# Altium PCB PCB1.PcbDoc (part 2 of 2)
Units mil, origin at the board's own origin, x right, y up, seen from the top; angles counter-clockwise.
Board outline 5117.33 x 2903.43 mil, 4 copper layers (Top Layer, Layer 1, Layer 2, Bottom Layer), stack 62.13 mil thick; 147 components, 97 nets, 532 pads, 86 vias.
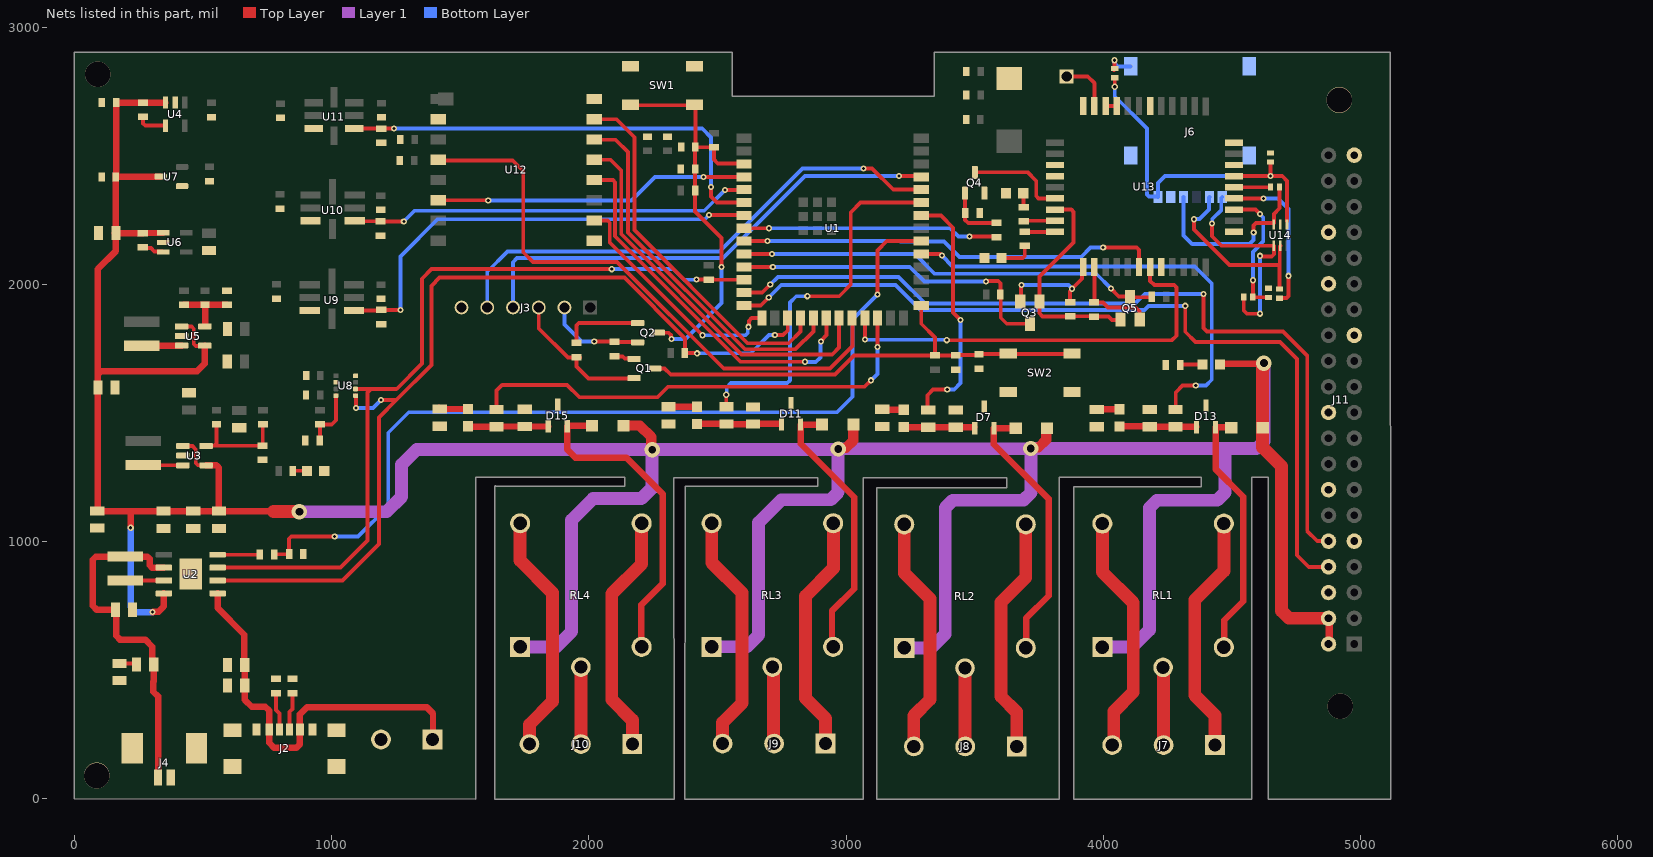
[diagram p4: the nets of this part, all layers, seen from the top]

## Via types
v1: diameter 24, hole 12, Top Layer to Bottom Layer, 75 vias
v2: diameter 60, hole 30, Top Layer to Bottom Layer, 7 vias
v3: diameter 100, hole 98.43, Top Layer to Bottom Layer, 4 vias

## Nets (pads, with @x,y where several pads share a name; then routed paths per layer and width w, separated by ;. In a path a pad name is that pad's centre, name@x,y a point inside that pad or via, vN(x,y) a via of type N, cw(c..) or ccw(c..) an arc to the next point about the centre after c; other vN are vias at no path point) (continued)
5V: C9.2 C10.2 C11.2 C12.2 C18.2 C20.2 C25.2 C27.2 D5.1 D6.1 D8.1 D10.1 D14.1 J11.2 J11.4 R16.2 R17.1 RL1.A1 RL2.A1 RL3.A1 RL4.A1 U2.8 U3.1 U3.4 U4.3 U5.1 U5.4 U6.1 U7.3 | length 15388.4
  Top Layer w15: C12.2@89,1118.46 C12.2@91.54,1121 ; C25.2@161.46,2199 161.56,2199.1 C25.2@162.02,2199.56 ; 218,1118.46 219,1117.47 ; R17.1@266,2198.56 R17.1@266.92,2199.48 ; U7.3@334.77,2418.5 U7.3@335.27,2419 ; U6.1@344.08,2199.48 U6.1@345,2200.4 ; U4.3@354.16,2706.56 U4.3@354.6,2707 ; U5.1@416.92,1836.4 417.32,1836 455.21,1836 464,1827.21 464,1768.79 472.79,1760 U5.4@505.48,1760 ; U3.1@421.92,1371.4 422.32,1371 459,1371 472,1358 472,1305.79 480.79,1297 511.68,1297 U3.4@512.08,1296.6
  Top Layer w25: C12.2@89,1118.46 218,1118.46 C11.2@561,1118.46 ; C12.2@91.54,1121 91.54,1649.54 ; C25.2@157.02,2198.56 C25.2@161.56,2198.56 ; C27.2@161.56,2417 161.56,2199.1 C25.2@161.56,2198.56 ; C27.2@161.66,2418 161.66,2429.54 162.56,2430.44 C18.2@162.56,2706 259.35,2706 259.81,2706.46 R16.2@266.44,2706.46 ; C27.2@166.06,2418.5 U7.3@334.77,2418.5 ; v1(219,1054) 219,1117.47 ; R17.1@266,2198.56 C25.2@161.56,2198.56 ; R17.1@266.92,2199.48 U6.1@344.08,2199.48 ; R16.2@267,2706.56 U4.3@354.16,2706.56 ; v1(304,726) 306.1,728.1 327.93,728.1 347.94,748.11 U2.8@347.94,799 ; U5.4@507.08,1761.6 507.08,1692.08 478,1663 105,1663 91.54,1649.54 ; U3.4@512.08,1296.6 552.21,1296.6 561,1287.81 C11.2@561,1119.47 ; C11.2@562,1118.46 773.46,1118.46 ; D8.1@4452.47,1689 4454.96,1691.5 4621.5,1691.5 4622.09,1692.09 v2(4624,1694) ; 91.54,1649.54 91.54,2059.54 161.56,2129.56 C25.2@161.56,2198.56
  Top Layer w30: J11.2@4878,602 J11.4@4878,702
  Top Layer w40: D14.1@2134.02,1451 2198,1451 2242.17,1406.83 2242.17,1360.83 v2(2246,1357) ; v2(2969,1360) 2972.83,1363.83 2999.18,1363.83 3028.02,1392.67 D10.1@3028.02,1455 ; v2(3718,1362) 3721.83,1365.83 3747.8,1365.83 3777.4,1395.43 3777.4,1437.36 3780.04,1440 D6.1@3781.02,1440
  Top Layer w50: 774.7,1117.23 v2@873.77,1117.23 ; v2@4622.09,1692.09 4622.09,1677.38 4619.02,1674.32 D5.1@4619.02,1442 4619.02,1365.98 4692,1293 4692,731 4721,702 J11.4@4875,702
  Layer 1 w50: v2(875,1116) 1213.59,1116 1272.17,1174.58 1272.17,1299.42 1330.75,1358 2245,1358 v2(2246,1357) ; RL4.A1@1732.78,590.95 1872.95,590.95 1933,651 1933,1084 2016,1167 2203.4,1167 2246,1209.6 v2(2246,1357) ; RL3.A1@2477,591.11 2614.11,591.11 2660,637 2660,1074.71 2748.29,1163 2939.71,1163 2969,1192.29 v2(2969,1360) 2967.5,1358.5 2247.5,1358.5 v2(2246,1357) ; v2@2973.62,1361 3717,1361 v2(3718,1362) 3718,1190.29 3688.71,1161 3414.29,1161 3385,1131.71 3385,641 3330.95,586.95 RL2.A1@3225.78,586.95 ; v2@3720.71,1362 4472,1362 ; RL1.A1@3995.78,589.95 4111.95,589.95 4179,657 4179,1131.71 4208.29,1161 4442.71,1161 4472,1190.29 4472,1362 ; v2(4624,1694) 4625,1693 4625,1391.29 4595.71,1362 4472,1362
  Bottom Layer w25: v1(219,1054) 219,747 240,726 v1(304,726)
ENABLE: C2.2 C5.1 Q2.3 R3.2 R6.1 SW1.1 U1.3 | length 1624.3
  Top Layer w15: SW1.1@2168.06,2696 2414,2696 C2.2@2414,2533 ; Q2.3@2270.35,1812 2310.14,1812 2319.28,1802.87 2319.28,1788.7 v1(2321,1786.98) ; R3.2@2486,2532.44 2486,2485 2501,2470 2601.02,2470 U1.3@2603.02,2468 ; R3.2@2487,2532.44 2486.72,2532.72 2413.84,2532.72 C2.2@2413.56,2533 2413.06,2532.5 2413.06,2448.5 C5.1@2412.56,2448 R6.1@2412.56,2365 2412.56,2282.63 2515,2180.19 v1(2515,2068)
  Bottom Layer w15: v1(2321,1786.98) 2374.98,1786.98 2515,1927 v1(2515,2068)
G.RXD: Q5.2 R31.1 U13.2 | length 353.4
  Top Layer w15: R31.1@3964,1929.56 3964.56,1929 3999,1929 4018.39,1909.61 4125.61,1909.61 4141,1894.21 4141,1864.09 Q5.2@4141.4,1863.69 ; R31.1@3965.07,1935.66 U13.2@3965.07,2066.7
G.TXD: Q3.2 R29.1 U13.1 | length 428.2
  Top Layer w15: Q3.2@3676.6,1933.31 3679,1935.71 3679,1991.56 3682,1994.56 v1(3682,1997) ; R29.1@3870.35,1928.35 3870.35,1972.63 3878.28,1980.56 v1(3878.28,1983) 3917.22,2021.93 3917.22,2062.16 U13.1@3921.76,2066.7 ; R29.1@3880.65,1931.35 R29.1@3881,1931
  Bottom Layer w15: v1(3682,1997) 3836.28,1997 3864.26,1997 v1(3878.28,1983)
GND: C1.2 C2.1 C3.2 C4.1 C5.2 C6.2 C7.1 C8.1 C9.1 C10.1 C11.1 C12.1 C14.1 C15.1 C16.1 C17.1 C18.1 C19.1 C20.1 C22.1 C23.1 C24.1 C25.1 C26.1 C27.1 C28.1 C29.1 C30.1 C31.1 C32.1 C33.1 C34.1 C35.1 C36.1 C37.1 C38.2 C39.1 C40.1 C41.1 C42.2 C43.1 D1.2 D2.2 D3.2 D7.3 D11.3 D13.3 D15.3 J1.2 J2.A12 J2.B12 J2.S1 J2.S2 J2.S3 J2.S4 J3.06 J4.1 J4.3 J4.4 J6.C5 J6.SH1 J6.SH2 J6.SH3 J11.6 J11.9 J11.14 J11.20 J11.25 J11.30 J11.34 J11.39 Q4.2 R1.2 R2.2 R14.1 R15.1 R19.1 R21.2 R22.2 R23.2 R24.1 R30.1 R38.2 R40.2 R41.2 R42.2 R44.2 R45.2 R46.2 R48.2 R49.2 SW1.2 SW2.2 U2.9 U3.2 U4.2 U5.2 U6.2 U7.1 U8.1 U8.7 U9.3 U10.3 U11.3 U12.2 U12.9 U12.16 U13.8 U13.13 U13.19 U13.21 U13.27 U13.30 U13.31 U13.33 U13.36 U13.37 U14.2 | length 43.3
  Top Layer w15: U13.31@4008.38,2692.69 U13.30@4051.69,2692.69
  other v3: 86.61,90.55 4920.28,360.24 4916.34,2716.54 90.55,2816.93
IO0: C4.2 C6.1 Q1.3 R7.1 SW2.1 U1.27 | length 1886.5
  Top Layer w15: Q1.3@2256.35,1673 2294,1673 2318,1649 2956,1649 3030.24,1723.24 R7.1@3345.68,1723.24 ; U1.27@3292,1918 3292,1847 3345.68,1793.32 R7.1@3345.68,1723.24 ; R7.1@3346,1723.56 R7.1@3345.68,1723.24 ; R7.1@3346.28,1723.84 3425.72,1723.84 3427.72,1725.84 3515.28,1725.84 3519.12,1729.68 3628.48,1729.68 3629.98,1728.18 3630.61,1728.8 SW2.1@3882,1728.8
NetC13_1: C13.1 R11.1 R14.2 U3.5 | length 387.2
  Top Layer w15: U3.5@512.08,1371.4 513.38,1372.7 543,1372.7 ; C13.1@552,1456.44 552,1381.7 543,1372.7 ; R14.2@731,1372.7 543,1372.7 ; R14.2@732,1372.56 732.5,1373.06 732.5,1451.94 R11.1@733,1452.44
NetC16_2: C16.2 J4.2 L2.2 R13.2 U2.6 | length 1359.9
  Top Layer w15: C16.2@158.54,736 C16.2@159.54,735
  Top Layer w25: C16.2@158.54,736 86,736 71,751 71,929 83.65,941.65 284.21,941.65 293,932.87 293,907.79 301.79,899 U2.6@347.94,899 ; C16.2@159.54,735 162.49,732.05 162.49,634.01 177.13,619.37 275.17,619.37 303.25,591.29 303.25,538.06 304.11,537.2 R13.2@312.8,537.2 ; R13.2@308.46,523 308.46,456.46 307,455 307,417 325.39,398.61 J4.2@325.39,82.83
NetC17_2: C17.2 R13.1 | length 68
  Top Layer w15: C17.2@175,526.46 238.07,526.46 R13.1@241.54,523
NetC21_1: C21.1 R18.1 R19.2 U5.5 | length 245.9
  Top Layer w15: U5.5@507.08,1836.4 U5.5@508.24,1837.56
  Top Layer w25: R18.1@426,1920.44 R19.2@592,1920.44 ; U5.5@508.1,1839.79 C21.1@508.1,1918.04
NetC43_2: C43.2 R35.1 U13.15 | length 514
  Top Layer w15: U13.15@4508,2290.61 4591.39,2290.61 v1(4609,2273) ; v1(4581,2016) 4580.72,2015.72 R35.1@4580.72,1951 4581.57,1950.14 4641.15,1950.14 C43.2@4642,1949.28
  Bottom Layer w15: v1(4581,2016) 4581,2126 4621,2166 4621,2261 v1(4609,2273)
NetD1_1: D1.1 R8.1 | length 54.5
  Top Layer w15: R8.1@849.56,1275.5 D1.1@904.03,1275.5
NetD2_1: D2.1 R26.2 | length 66.1
  Top Layer w15: D2.1@3688.47,2354 D2.1@3688.47,2366.63 ; R26.2@3690,2300.56 D2.1@3690,2354
NetD3_1: D3.1 R25.2 | length 131.8
  Top Layer w15: D3.1@3604.47,2102 3685.21,2102 3694,2110.79 R25.2@3694,2149.44
NetD4_1: D4.1 D13.1 R37.2 R46.1 | length 304.3
  Top Layer w15: D4.1@4060,1450.53 D4.1@4062,1448.54 ; R46.1@4178,1448.54 R46.1@4180,1446.54 ; D13.1@4360.46,1446.54 D13.1@4362,1445
  Top Layer w25: D4.1@4062,1448.54 R46.1@4178,1448.54 ; R46.1@4180,1446.54 D13.1@4360.46,1446.54
NetD4_2: D4.2 R38.1 | length 88.4
  Top Layer w15: R38.1@3974,1513.46 R38.1@3974.5,1513.96 ; D4.2@4061.5,1513.96 D4.2@4062,1514.47
  Top Layer w25: R38.1@3974.5,1513.96 D4.2@4061.5,1513.96
NetD5_2: D5.2 D13.2 RL1.A2 | length 993.4
  Top Layer w15: D5.2@4493.98,1445 D5.2@4496.98,1442
  Top Layer w25: RL1.A2@4468.22,589.95 4470,591.73 4470,694 4544,768 4544,1174 4436,1282 D13.2@4436,1445 D5.2@4493.98,1445
NetD6_2: D6.2 D7.2 RL2.A2 | length 1061.5
  Top Layer w15: RL2.A2@3698.22,586.95 RL2.A2@3700,588.73
  Top Layer w25: D7.2@3574,1441 3574,1379 3787,1166 3787,790 3700,703 RL2.A2@3700,588.73 ; D7.2@3576.5,1440 D6.2@3658.98,1440
NetD7_1: D7.1 D9.1 R39.2 R40.1 | length 278.5
  Top Layer w15: D9.1@3224,1445.53 D9.1@3224.5,1445.04 ; R39.2@3318.5,1445.04 R39.2@3319,1444.54 ; D7.1@3497.5,1444.54 3500,1442.04 D7.1@3500,1441
  Top Layer w25: D9.1@3224.5,1445.04 R39.2@3318.5,1445.04 ; R39.2@3319,1444.54 D7.1@3497.5,1444.54
NetD8_2: D8.2 R42.1 | length 88.4
  Top Layer w15: R42.1@4298,1687 4299,1688 4384.53,1688 D8.2@4385.53,1689
NetD9_2: D9.2 R41.1 | length 84.8
  Top Layer w15: R41.1@3140,1514.46 R41.1@3142,1512.47
  Top Layer w25: R41.1@3142,1512.47 D9.2@3224,1512.47
NetD10_2: D10.2 D11.2 RL3.A2 | length 1070.5
  Top Layer w25: D10.2@2905.98,1455 D11.2@2823,1455 2823,1380 3031,1172 3031,817 2945,731 2945,595.55 RL3.A2@2949.44,591.11
NetD11_1: D11.1 D12.1 R43.2 R44.1 | length 331.6
  Top Layer w15: R43.2@2535,1457.54 R43.2@2535.5,1457.04 ; R44.1@2637.5,1457.04 R44.1@2638,1456.54 R44.1@2639.5,1458.04 ; D11.1@2746.5,1458.04 2749,1455.54 D11.1@2749,1455
  Top Layer w25: D12.1@2420,1457.53 R43.2@2535,1457.54 ; R43.2@2535.5,1457.04 R44.1@2637.5,1457.04 ; R44.1@2639.5,1458.04 D11.1@2746.5,1458.04
NetD12_2: D12.2 R45.1 | length 110
  Top Layer w25: R45.1@2310,1524.46 D12.2@2420,1524.47
NetD14_2: D14.2 D15.2 RL4.A2 | length 1259.1
  Top Layer w15: RL4.A2@2204,592.17 RL4.A2@2205.22,590.95
  Top Layer w25: D14.2@2011.98,1451 1918.5,1451 1916,1448.5 D15.2@1916,1448 1916,1358 1947.16,1326.84 2145.16,1326.84 2287,1185 2287,837 2204,754 RL4.A2@2204,592.17
NetD15_1: D15.1 D16.1 R47.2 R48.1 | length 311.4
  Top Layer w15: D16.1@1530,1448.53 1545,1448.53 D16.1@1547,1446.54
  Top Layer w25: D16.1@1547,1446.54 R47.2@1641,1446.54 ; R47.2@1642,1447.54 R48.1@1751,1447.54 D15.1@1841.54,1447.54
NetD16_2: D16.2 R49.1 | length 116.1
  Top Layer w15: R49.1@1418,1525.46 R49.1@1428,1515.47
  Top Layer w25: R49.1@1428,1515.47 D16.2@1530,1515.47
NetJ2_A5: J2.A5 R1.1 | length 145.8
  Top Layer w15: 784,345 797.32,331.68 J2.A5@797.32,269.11 ; 784,347 R1.1@784,411.44
NetJ2_B5: J2.B5 R2.1 | length 143
  Top Layer w15: J2.B5@836.68,269.11 836.69,338.69 848,350 ; 848,352 R2.1@848,409.44
NetJ3_02: J3.02 Q2.2 R9.1 | length 363.2
  Top Layer w15: v1(2021,1778) 2021.72,1777.28 2099.28,1777.28 R9.1@2100,1776.56 Q2.2@2174.56,1776.56
  Bottom Layer w15: J3.02@1905,1910 1905,1844.42 1971.42,1778 v1(2021,1778)
NetJ3_03: J3.03 Q1.2 R10.1 | length 576.5
  Top Layer w15: J3.03@1805,1910 1805,1829 1918.56,1715.44 R10.1@1952,1715.44 ; R10.1@1952,1717.44 R10.1@1952,1715.44 ; R10.1@1965,1715.44 R10.1@1952,1715.44 ; Q1.2@2183.97,1634 1998,1634 1952,1680 R10.1@1952,1715.44
NetJ3_04: J3.04 U1.37 | length 1903
  Top Layer w15: v1(3205.12,2421) 3289,2421 U1.37@3292,2418
  Bottom Layer w15: J3.04@1705,1910 1705,2086 1721,2102 2521,2102 2840,2421 v1(3205.12,2421)
NetJ3_05: J3.05 U1.36 | length 2026.9
  Top Layer w15: v1(3068,2450) 3101,2450 3183,2368 U1.36@3292,2368
  Bottom Layer w15: J3.05@1605,1910 1605,2049 1684,2128 2507,2128 2830,2451 3067,2451 v1(3068,2450)
NetJ5_01: J5.01 U13.32 | length 208.1
  Top Layer w15: J5.01@3857,2808 3939,2808 3965.07,2781.93 U13.32@3965.07,2692.69
NetJ6_S/W: J6.S/W R36.2 | length 119.4
  Top Layer w15: R36.2@4040,2832.72 4040.46,2832.72 4043,2835.26 v1(4043,2871)
  Bottom Layer w15: v1(4043,2871) 4043,2860 4055.54,2847.46 J6.S/W@4106.37,2847.46
NetJ7_1: J7.1 RL1.NO | length 940.8
  Top Layer w15: J7.1@4433,210.11 J7.1@4434,209.11
  Top Layer w50: J7.1@4433,210.11 4433,325.11 4355,403.11 4355,773.11 4468.22,886.33 RL1.NO@4468.22,1070.27
NetJ7_2: J7.2 RL1.COM | length 302.9
  Top Layer w15: RL1.COM@4232,511.21 RL1.COM@4233,510.21 ; J7.2@4233,210.11 J7.2@4234,209.11
  Top Layer w50: J7.2@4233,210.11 RL1.COM@4233,510.21
NetJ7_3: J7.3 RL1.NC | length 944.9
  Top Layer w15: J7.3@4034,209.11 J7.3@4040,215.11
  Top Layer w50: RL1.NC@3995.78,1070.27 3995.78,882.33 4116,762.11 4116,415.11 4040,339.11 J7.3@4040,215.11
NetJ8_1: J8.1 RL2.NO | length 928.3
  Top Layer w50: J8.1@3663,204.11 3663,337.11 3602,398.11 3602,764.11 3698.22,860.33 RL2.NO@3698.22,1067.27
NetJ8_2: J8.2 RL2.COM | length 304.5
  Top Layer w15: RL2.COM@3462,508.21 RL2.COM@3462.5,507.71 ; J8.2@3462.5,204.61 J8.2@3463,204.11
  Top Layer w50: J8.2@3462.5,204.61 RL2.COM@3462.5,507.71
NetJ8_3: J8.3 RL2.NC | length 930.8
  Top Layer w50: RL2.NC@3225.78,1067.27 3225.78,878.33 3326,778.11 3326,386.11 3263,323.11 J8.3@3263,204.11
NetJ9_1: J9.1 RL3.NO | length 936.3
  Top Layer w50: J9.1@2920,215.11 2920,313.11 2842,391.11 2842,788.11 2950.22,896.33 RL3.NO@2950.22,1074.27
NetJ9_2: J9.2 RL3.COM | length 302.6
  Top Layer w15: RL3.COM@2714,515.21 RL3.COM@2717,512.21 ; J9.2@2717,218.11 J9.2@2720,215.11
  Top Layer w50: J9.2@2717,218.11 RL3.COM@2717,512.21
NetJ9_3: J9.3 RL3.NC | length 938.8
  Top Layer w50: RL3.NC@2477.78,1074.27 2477.78,918.33 2595,801.11 2595,372.11 2520,297.11 J9.3@2520,215.11
NetJ10_1: J10.1 RL4.NO | length 939.4
  Top Layer w50: J10.1@2169,213.11 2169,306.11 2089,386.11 2089,797.11 2205.22,913.33 RL4.NO@2205.22,1071.27
NetJ10_2: J10.2 RL4.COM | length 299.1
  Top Layer w50: J10.2@1969,213.11 RL4.COM@1969,512.21
NetJ10_3: J10.3 RL4.NC | length 946.9
  Top Layer w50: RL4.NC@1732.78,1071.27 1732.78,926.33 1858,801.11 1858,378.11 1769,289.11 J10.3@1769,213.11
NetJ11_8: J11.8 U1.14 | length 3278.4
  Top Layer w15: U1.14@2603.02,1918 2668,1918 v1(2699,1949) ; v1(4318,1916.5) 4318,1816 4358,1776 4687,1776 4753,1710 4753,947 4798,902 J11.8@4875,902
  Bottom Layer w15: v1(2699,1949) 2747.75,1997.75 3191.25,1997.75 3289,1900 4159,1900 4175.5,1916.5 v1(4318,1916.5)
NetJ11_10: J11.10 U1.13 | length 3229.6
  Top Layer w15: U1.13@2603.02,1968 2674,1968 v1(2705,1999) ; v1(4389,1962) 4389,1831 4403,1817 4698,1817 4792,1723 4792,1042 4831.38,1002.62 4874.38,1002.62 J11.10@4875,1002
  Bottom Layer w15: v1(2705,1999) 2735,2029 3203.33,2029 3307.33,1925 4123,1925 4160.74,1962.74 4388.26,1962.74 v1(4389,1962)
NetL1_1: L1.1 U3.3 | length 155.2
  Top Layer w15: L1.1@267,1297.35 267.37,1296.97 421.55,1296.97 U3.3@421.92,1296.6
NetL2_1: L2.1 U2.7 | length 149.3
  Top Layer w15: L2.1@198.65,849 U2.7@347.94,849
NetL3_1: L3.1 U5.3 | length 155
  Top Layer w15: L3.1@262,1761.35 L3.1@262.13,1761.47 ; U5.3@416.8,1761.47 U5.3@416.92,1761.6
  Top Layer w25: L3.1@262.13,1761.47 U5.3@416.8,1761.47
NetQ1_1: Q1.1 R9.2 | length 80.2
  Top Layer w15: R9.2@2100,1721.44 2102.27,1719.17 2131.83,1719.17 2139.46,1711.54 2174.51,1711.54 Q1.1@2175.65,1710.4
NetQ2_1: Q2.1 R10.2 | length 309.3
  Top Layer w15: R10.2@1952,1772.56 1952,1840.62 1960.79,1849.4 Q2.1@2189.65,1849.4
NetQ4_1: Q4.1 R27.2 R30.2 | length 231.5
  Top Layer w15: Q4.1@3462.6,2354.65 3462.6,2250.49 3474.53,2238.56 R27.2@3585,2238.56
NetR12_1: R12.1 R15.2 U1.32 | length 3498.7
  Top Layer w15: R12.1@776.56,950 777.56,951 833.44,951 R15.2@834.44,952 834.44,1011.21 843.23,1020 v1(1012,1020) ; v1(3122,1961) 3122,2132 3158,2168 U1.32@3292,2168
  Bottom Layer w15: v1(1012,1020) 1103,1020 1220,1137 1220,1423 1300,1503 2965,1503 3025,1563 3025,1864 v1(3122,1961)
NetR12_2: R12.2 U2.4 | length 167.2
  Top Layer w15: U2.4@557,949 557.28,948.72 723.72,948.72 R12.2@724,948.44
NetR16_1: R16.1 U4.4 | length 116.9
  Top Layer w15: R16.1@267,2651.44 267,2625.79 275.79,2617 U4.4@354.6,2617
NetR17_2: R17.2 U6.3 | length 86.4
  Top Layer w15: R17.2@266,2143.44 268.77,2140.67 297.33,2140.67 310.79,2127.21 343.39,2127.21 U6.3@345,2125.6
NetR20_1: R20.1 R24.2 U8.5 | length 225.4
  Top Layer w15: R24.2@953.56,1393 954.28,1393.72 954.28,1452.72 R20.1@955,1453.44 ; R20.1@955,1455.44 1000.44,1455.44 1016.81,1471.81 U8.5@1016.81,1567.61
NetR21_1: R21.1 U1.5 U10.5 | length 1563
  Top Layer w15: U10.5@1090.06,2247.34 1091.95,2245.45 R21.1@1188.11,2245.45 ; R21.1@1190,2244.56 v1(1280.56,2244.56) ; v1(2529,2366.62) 2529.69,2367.31 2602.33,2367.31 U1.5@2603.02,2368
  Bottom Layer w15: v1(1280.56,2244.56) 1322,2286 2448.38,2286 v1(2529,2366.62)
NetR22_1: R22.1 U1.6 U11.5 | length 1769.3
  Top Layer w15: U11.5@1087.7,2605.89 1087.86,2605.72 1192.84,2605.72 R22.1@1193,2605.56 v1(1242.44,2605.56) ; v1(2475,2378) 2475,2341 2498,2318 U1.6@2603.02,2318
  Bottom Layer w15: v1(1242.44,2605.56) 2440.44,2605.56 2475,2571 v1(2475,2378)
NetR23_1: R23.1 U1.7 U9.5 | length 1789.6
  Top Layer w15: U9.5@1087.06,1898.34 1087.45,1897.95 R23.1@1191.61,1897.95 ; R23.1@1193,1900.56 v1(1267.56,1900.56) ; v1(2467,2269) 2602.02,2269 U1.7@2603.02,2268
  Bottom Layer w15: v1(1267.56,1900.56) 1267.56,2108.56 1412,2253 2451,2253 v1(2467,2269)
NetR25_1: R25.1 U13.42 | length 119.3
  Top Layer w15: R25.1@3698,2206.56 3695.44,2206.56 3698,2204 U13.42@3811.15,2204
NetR26_1: R26.1 U13.41 | length 124.7
  Top Layer w15: R26.1@3686.49,2247.31 U13.41@3811.15,2247.31
NetR27_1: R27.1 U1.8 | length 998.9
  Top Layer w15: U1.8@2603.02,2218 v1(2700,2218) ; v1(3479,2186) R27.1@3588.63,2186
  Bottom Layer w15: v1(2700,2218) 3404,2218 3436,2186 v1(3479,2186)
NetR33_1: R33.1 U13.17 | length 144.3
  Top Layer w15: U13.17@4508,2377.23 R33.1@4652.28,2377.23
NetR34_1: R34.1 U13.16 | length 605.1
  Top Layer w15: U13.16@4508.08,2334 v1(4622,2334) ; R34.1@4685,1946.28 4710.97,1946.28 4719.75,1955.07 v1(4719.75,2033.18)
  Bottom Layer w15: v1(4622,2334) 4679,2334 4719.75,2293.25 v1(4719.75,2033.18)
NetR37_1: R37.1 U1.31 | length 1778.5
  Top Layer w15: U1.31@3292,2118 3366,2118 v1(3372,2112) ; R37.1@4280,1513.46 4281,1514.47 4281,1580 4308,1607 v1(4359,1607)
  Bottom Layer w15: v1(3372,2112) 3414,2070 4355,2070 4421,2004 4421,1629 4399,1607 v1(4359,1607)
NetR39_1: R39.1 U1.34 | length 967.1
  Top Layer w15: U1.34@3292,2268 3368,2268 3416,2220 3416,1890 v1(3445,1861) ; R39.1@3319,1511.46 3316,1514.46 3316,1569 3338,1591 v1(3393,1591)
  Bottom Layer w15: v1(3393,1591) 3420,1591 3445,1616 v1(3445,1861)
NetR43_1: R43.1 U1.35 | length 1472.3
  Top Layer w15: v1(2534,1571) 2534,1525.46 R43.1@2535,1524.46 ; v1(2849,1954) 2973,1954 3018,1999 3018,2280 3056,2318 U1.35@3292,2318
  Bottom Layer w15: v1(2534,1571) 2535.72,1572.72 2535.72,1599.72 2552,1616 2771,1616 2782,1627 2782,1930 2806,1954 v1(2849,1954)
NetR47_1: R47.1 U1.24 | length 1838.2
  Top Layer w15: R47.1@1641,1513.46 1641,1587 1663,1609 1915,1609 1963,1561 2266.28,1561 2307.28,1602 3072,1602 v1(3097,1627) ; v1(3122,1757) 3122.51,1757.51 U1.24@3122.51,1868.79
  Bottom Layer w15: v1(3097,1627) 3122,1652 v1(3122,1757)
NetU1_4: U1.4 U12.6 | length 1226.5
  Top Layer w15: U12.6@1415,2326.78 1608.22,2326.78 v1(1609,2326) ; v1(2446,2417) 2446.5,2417.5 2602.52,2417.5 U1.4@2603.02,2418
  Bottom Layer w15: v1(1609,2326) 2166,2326 2257,2417 v1(2446,2417)
NetU1_15: U1.15 U12.10 | length 933.8
  Top Layer w15: U12.10@2021.3,2248.04 2072.21,2248.04 2081,2239.25 2081,2162 2441,1802 v1(2442,1802) ; v1(2620,1835) 2621.72,1836.72 2621.72,1857.72 2632.79,1868.79 U1.15@2672.51,1868.79
  Bottom Layer w15: v1(2442,1802) 2608.49,1802 2617.28,1810.79 2617.28,1829.84 2620,1832.56 v1(2620,1835)
NetU1_18: U1.18 U12.15 | length 1444.3
  Top Layer w15: U12.15@2021.3,2641.74 2107.26,2641.74 2177,2572 2177,2211 2617,1771 2776.75,1771 2822.51,1816.76 U1.18@2822.51,1868.79
NetU1_19: U1.19 U12.14 | length 1452.1
  Top Layer w15: U12.14@2021.3,2563 2022.3,2562 2104,2562 2152,2514 2152,2202 2606,1748 2803.75,1748 2872.51,1816.76 U1.19@2872.51,1868.79
NetU1_20: U1.20 U12.12 | length 1465.4
  Top Layer w15: U12.12@2021.3,2405.52 2093.21,2405.52 2102,2396.73 2102,2187 2590,1699 v1(2840,1699) ; v1(2902,1778) 2902,1780.44 2924,1802.44 2924,1867.3 U1.20@2922.51,1868.79
  Bottom Layer w15: v1(2840,1699) 2841,1698 2882,1698 2900.28,1716.28 2900.28,1776.28 v1(2902,1778)
NetU1_21: U1.21 U12.13 | length 1534.4
  Top Layer w15: U12.13@2021.3,2484.26 2083.74,2484.26 2126,2442 2126,2195 2593,1728 2946,1728 2972.51,1754.51 U1.21@2972.51,1868.79
NetU1_22: U1.22 U12.4 | length 2275
  Top Layer w15: U12.4@1415,2484.26 1418.26,2481 1704,2481 1745,2440 1745,2125 1783,2087 2110,2087 2524,1673 2937,1673 3024,1760 3024,1867.3 U1.22@3022.51,1868.79
P.06: U1.9 U13.6 | length 1646.6
  Top Layer w15: U1.9@2603.02,2168 v1(2694,2168) ; v1(3999,2143) 4129.51,2143 4138.3,2134.21 U13.6@4138.3,2066.7
  Bottom Layer w15: v1(2694,2168) 3208.79,2168 3210.79,2166 3381,2166 3440,2107 3914,2107 3950,2143 v1(3999,2143)
P.07: U1.23 U13.7 | length 1656.6
  Top Layer w15: U1.23@3072.51,1868.79 3072.76,1868.54 3072.76,1786.24 v1(3073,1786) ; v1(3391,1783) 4267,1783 4284,1800 4284,1988.21 4275.21,1997 4198,1997 4181.61,2013.39 U13.7@4181.61,2066.7
  Bottom Layer w15: v1(3073,1786) 3074.5,1784.5 3389.5,1784.5 v1(3391,1783)
P_SCL: R4.2 U1.17 U2.2 U8.4 | length 3630.5
  Top Layer w15: U2.2@557,849 1042,849 1184,991 1184,1483 1251,1550 ; U8.4@1093.19,1567.61 1093.64,1567.61 1095,1566.26 v1(1095,1519) ; v1(1192,1550) 1251,1550 ; v1(2421,1732) 2420.5,1732.5 2374.06,1732.5 2374.06,1789.94 2138,2026 1419.7,2026 1387.8,1994.09 1387.8,1686.8 1251,1550 ; v1(2722.66,1802.66) 2754.66,1802.66 2773,1821 2773,1868.3 U1.17@2772.51,1868.79
  Bottom Layer w15: v1(1095,1519) 1161,1519 v1(1192,1550) ; v1(2421,1732) 2629,1732 2699.66,1802.66 v1(2722.66,1802.66)
P_SDA: R5.2 U1.12 U2.3 U8.3 | length 3130.3
  Top Layer w15: U2.3@557,899 1035,899 1140,1004 1140,1579 1154.2,1593.2 ; U8.3@1093.19,1593.2 1154.2,1593.2 ; v1(2089,2059) 1388.72,2059 1351.38,2021.65 1351.38,1692.38 1251.5,1592.5 1250.8,1593.2 1154.2,1593.2 ; v1(2418.28,2018.72) 2465.72,2018.72 R5.2@2466,2018.44 ; R5.2@2471.1,2018.34 2486.63,2018.34 2486.97,2018 U1.12@2603.02,2018
  Bottom Layer w15: v1(2089,2059) 2328,2059 2369,2018 2417.56,2018 v1(2418.28,2018.72)
PR_SIM: Q4.3 U13.39 | length 389.7
  Top Layer w15: Q4.3@3498.5,2436 3705,2436 3739,2402 3739,2342.71 3747.79,2333.92 U13.39@3811.15,2333.92
RXD: Q5.3 R32.1 U1.10 | length 1654.6
  Top Layer w15: U1.10@2603.02,2118 v1(2712,2118) ; v1(4029,1984) 4059.6,1953.4 4100.91,1953.4 Q5.3@4104,1950.31 ; Q5.3@4104.31,1950 R32.1@4188.44,1950
  Bottom Layer w15: v1(2712,2118) 3267,2118 3344,2041 3972,2041 v1(4029,1984)
simCLK: J6.C3 R34.2 U14.5 | length 722.7
  Top Layer w15: v1(4352,2253) 4352,2213 4490.32,2074.68 4685,2074.68 R34.2@4685,1981.72 ; 4685.5,2074.68 4685.5,2147.5 U14.5@4688,2150
  Bottom Layer w15: v1(4352,2253) 4353.72,2254.72 4373.72,2254.72 4410.38,2291.38 4410.38,2338.08 J6.C3@4411.88,2339.58
simData: J6.C7 R35.2 U14.4 | length 862.9
  Top Layer w15: v1(4422,2236) 4422,2187 4459,2150 U14.4@4662.41,2150 4662.41,2117 4653.62,2108.21 4611.79,2108.21 v1(4609,2111) ; R35.2@4545.28,1951 4545.28,1897.72 4557,1886 v1(4609,1886)
  Bottom Layer w15: v1(4422,2236) 4422.9,2236.9 4422.9,2253.9 4458.25,2289.25 4458.25,2335.95 J6.C7@4461.88,2339.58 ; v1(4609,1886) v1(4609,2111)
simRST: J6.C2 R33.2 U14.3 | length 729.4
  Top Layer w15: v1(4584,2202) 4584,2229.21 4592.79,2238 4662.41,2238 4662.41,2273.41 4684.72,2295.72 R33.2@4684.72,2378
  Bottom Layer w15: J6.C2@4311.88,2339.58 4311.88,2190.12 4345,2157 4568,2157 4584,2173 v1(4584,2202)
simVcc: C42.1 J6.C1 R36.1 U13.18 U14.1 | length 1476.4
  Top Layer w15: R36.1@4040,2800.74 4044,2800.74 v1(4044,2768) ; U13.18@4508,2420.54 v1@4649.46,2420.54 ; C42.1@4650,2475.28 4649,2474.28 v1(4649,2421) 4695,2421 4714,2402 U14.1@4714,2245.18
  Bottom Layer w15: v1(4044,2768) 4044,2730.96 4169,2605.96 4169,2349.91 4177.79,2341.13 4210.34,2341.13 J6.C1@4211.88,2339.58 ; J6.C1@4211.92,2345.52 4211.92,2393.92 4239,2421 v1(4649,2421)
TXD: Q3.3 R28.1 U1.11 | length 1281.5
  Top Layer w15: U1.11@2603.02,2068 v1(2715,2068) ; v1(3544,2011) 3546,2013 3590.77,2013 3599.56,2004.21 R28.1@3599.56,1961 ; R28.1@3601,1961 3601,1870 3624.31,1846.69 Q3.3@3714,1846.69
  Bottom Layer w15: v1(2715,2068) 3247,2068 3304,2011 v1(3544,2011)
V_Input: C7.2 C8.2 J1.1 J2.A9 J2.B9 U2.1 | length 1569.7
  Top Layer w15: J1.1@1392,231 J1.1@1394,233
  Top Layer w25: U2.1@557,799 557,742 661,638 C8.2@661,537.2 ; C8.2@662.46,521 662.46,384.64 689.11,358 742.51,358 757.16,343.36 757.16,217.84 777,198 862.21,198 876.84,212.63 876.84,328.84 905,357 1369,357 1394,332 J1.1@1394,233
VDD_EXT: Q3.1 Q5.1 R29.2 R31.2 U13.40 | length 851.8
  Top Layer w15: U13.40@3811.15,2290.61 3875.21,2290.61 3884,2281.83 3884,2163 3751.4,2030.4 3751.4,1887.6 3763.56,1875.44 R29.2@3871,1875.44 3871.5,1875.94 R31.2@3971.5,1875.94 ; R31.2@3972,1875.44 4019.56,1875.44 4033,1862 4064.91,1862 Q5.1@4066.6,1863.69
pads on no net: J6.C6 J11.1 J11.3 J11.5 J11.7 J11.11 J11.12 J11.13 J11.15 J11.16 J11.17 J11.18 J11.19 J11.21 J11.22 J11.23 J11.24 J11.26 J11.27 J11.28 J11.29 J11.31 J11.32 J11.33 J11.35 J11.36 J11.37 J11.38 J11.40 U1.1 U1.16 U1.25 U1.26 U1.28 U1.29 U1.30 U1.33 U1.38 U1.39 U1.40 U1.41 U1.42 U1.43 U1.44 U1.45 U1.46 U1.47 U1.48 U1.49 U2.5 U4.5 U6.4 U9.2 U9.4 U9.6 U9.8 U10.2 U10.4 U10.6 U10.8 U11.2 U11.4 U11.6 U11.8 U12.1 U12.5 U12.7 U12.8 U12.11 U13.3 U13.4 U13.5 U13.9 U13.10 U13.11 U13.12 U13.14 U13.20 U13.22 U13.23 U13.24 U13.25 U13.26 U13.28 U13.29 U13.38 U14.6

## Polygon pours and split planes (outlines as drawn)
GND on Top Layer "GND_L01_P043" (solid, remove dead copper, pour order 43): 3885,1214 4380,1214 4380,1250 3920,1250 3829,1250 3829,-1.43 3118,-1.43 3118,1209 3624,1209 3624,1248 3066,1248 3066,-1.43 2373.02,-1.43 2374,1216 2889,1216 2889,1249 2830,1249 2402,1248 2330.49,1248 2331.52,-1.43 1635,-1.43 1635,1216 1636,1217 1637,1216 2139,1216 2139,1250 1560,1250 1560,-1.43 -0.19,0.14 0,2902 2558,2902 2558,2732 3343,2732 3343,2902 5115.57,2902 5117.14,-1.43 4641,-1.43 4641,1250 4576,1250 4576,-1.43 3885,-1.43
4V on Top Layer "4V_L01_P021" (solid, remove dead copper, pour order 21): 3507,2662 3507,2620 3587,2620 3597,2610 3597,2550 3679,2550 3682,2553 3682,2648 3660,2670 3563,2670 3536,2662
4V on Top Layer "4V_L01_P019" (solid, remove dead copper, pour order 19): 3444.73,2535.09 3507,2574.09 3507,2662 3536,2662 3536,2513 3493,2485.74 3444.73,2485.74
5V on Top Layer "5V_L01_P017" (solid, remove dead copper, pour order 17): 529.44,1137 529.44,1099 591.51,1099 598.96,1092.18 808,1092.18 808,1142.21 596.06,1142.21 589.7,1137
5V on Top Layer "5V_L01_P014" (solid, remove dead copper, pour order 14): 154,2736 144.96,2728.52 144.96,2686 119.57,2668.24 119.57,2450.48 137.57,2432.48 137.57,2395.24 122.61,2380.28 122.61,2243.51 135.57,2230.55 135.57,2171.24 56,2091.67 56,1102.24 123.18,1102.24 131,1106 131,1240.88 131,1545.51 107.82,1568.68 107.82,1640.49 131.57,1664.24 131.57,2055.55 193.57,2120.55 193.57,2138.24 193.57,2730.04 185,2736
3V3 on Layer 1 "3V3_L02_P044" (solid, pour order 44): 3885,1214 4380,1214 4380,1250 3920,1250 3829,1250 3829,-1.43 3118,-1.43 3118,1209 3624,1209 3624,1248 3066,1248 3066,-1.43 2373.02,-1.43 2374,1216 2889,1216 2889,1249 2830,1249 2402,1248 2330.49,1248 2331.52,-1.43 1635,-1.43 1635,1216 1636,1217 1637,1216 2139,1216 2139,1250 1560,1250 1560,-1.43 -0.19,0.14 0,2902 2558,2902 2558,2732 3343,2732 3343,2902 5115.57,2902 5117.14,-1.43 4641,-1.43 4641,1250 4576,1250 4576,-1.43 3885,-1.43
GND on Layer 2 "GND_L03_P045" (solid, pour order 45): 3885,1214 4380,1214 4380,1250 3920,1250 3829,1250 3829,-1.43 3118,-1.43 3118,1209 3624,1209 3624,1248 3066,1248 3066,-1.43 2373.02,-1.43 2374,1216 2889,1216 2889,1249 2830,1249 2402,1248 2330.49,1248 2331.52,-1.43 1635,-1.43 1635,1216 1636,1217 1637,1216 2139,1216 2139,1250 1560,1250 1560,-1.43 -0.19,0.14 0,2902 2558,2902 2558,2732 3343,2732 3343,2902 5115.57,2902 5117.14,-1.43 4641,-1.43 4641,1250 4576,1250 4576,-1.43 3885,-1.43
GND on Bottom Layer "GND_L04_P046" (solid, pour order 46): 3885,1214 4380,1214 4380,1250 3920,1250 3829,1250 3829,-1.43 3118,-1.43 3118,1209 3624,1209 3624,1248 3066,1248 3066,-1.43 2373.02,-1.43 2374,1216 2889,1216 2889,1249 2830,1249 2402,1248 2330.49,1248 2331.52,-1.43 1635,-1.43 1635,1216 1636,1217 1637,1216 2139,1216 2139,1250 1560,1250 1560,-1.43 -0.19,0.14 0,2902 2558,2902 2558,2732 3343,2732 3343,2902 5115.57,2902 5117.14,-1.43 4641,-1.43 4641,1250 4576,1250 4576,-1.43 3885,-1.43

## Silkscreen, mask and mechanical layers (free items; w line width, h text height)
Top Overlay:
  text "+" at 1409,466.34 h40
  text "-" at 1153,450.01 h40
  text "NO" at 2907,88 h20
  text "NC" at 3247,87 h20
  text "NC" at 1738,86 h20
  text "NC" at 2496,86 h20
  text "NO" at 3650,80 h20
  text "NO" at 2144,78 h20
  text "NO" at 4417,72 h20
  text "NC" at 4025,71 h20